# EAGLE board Esquema20 -2 (EAGLE 9.3.0)
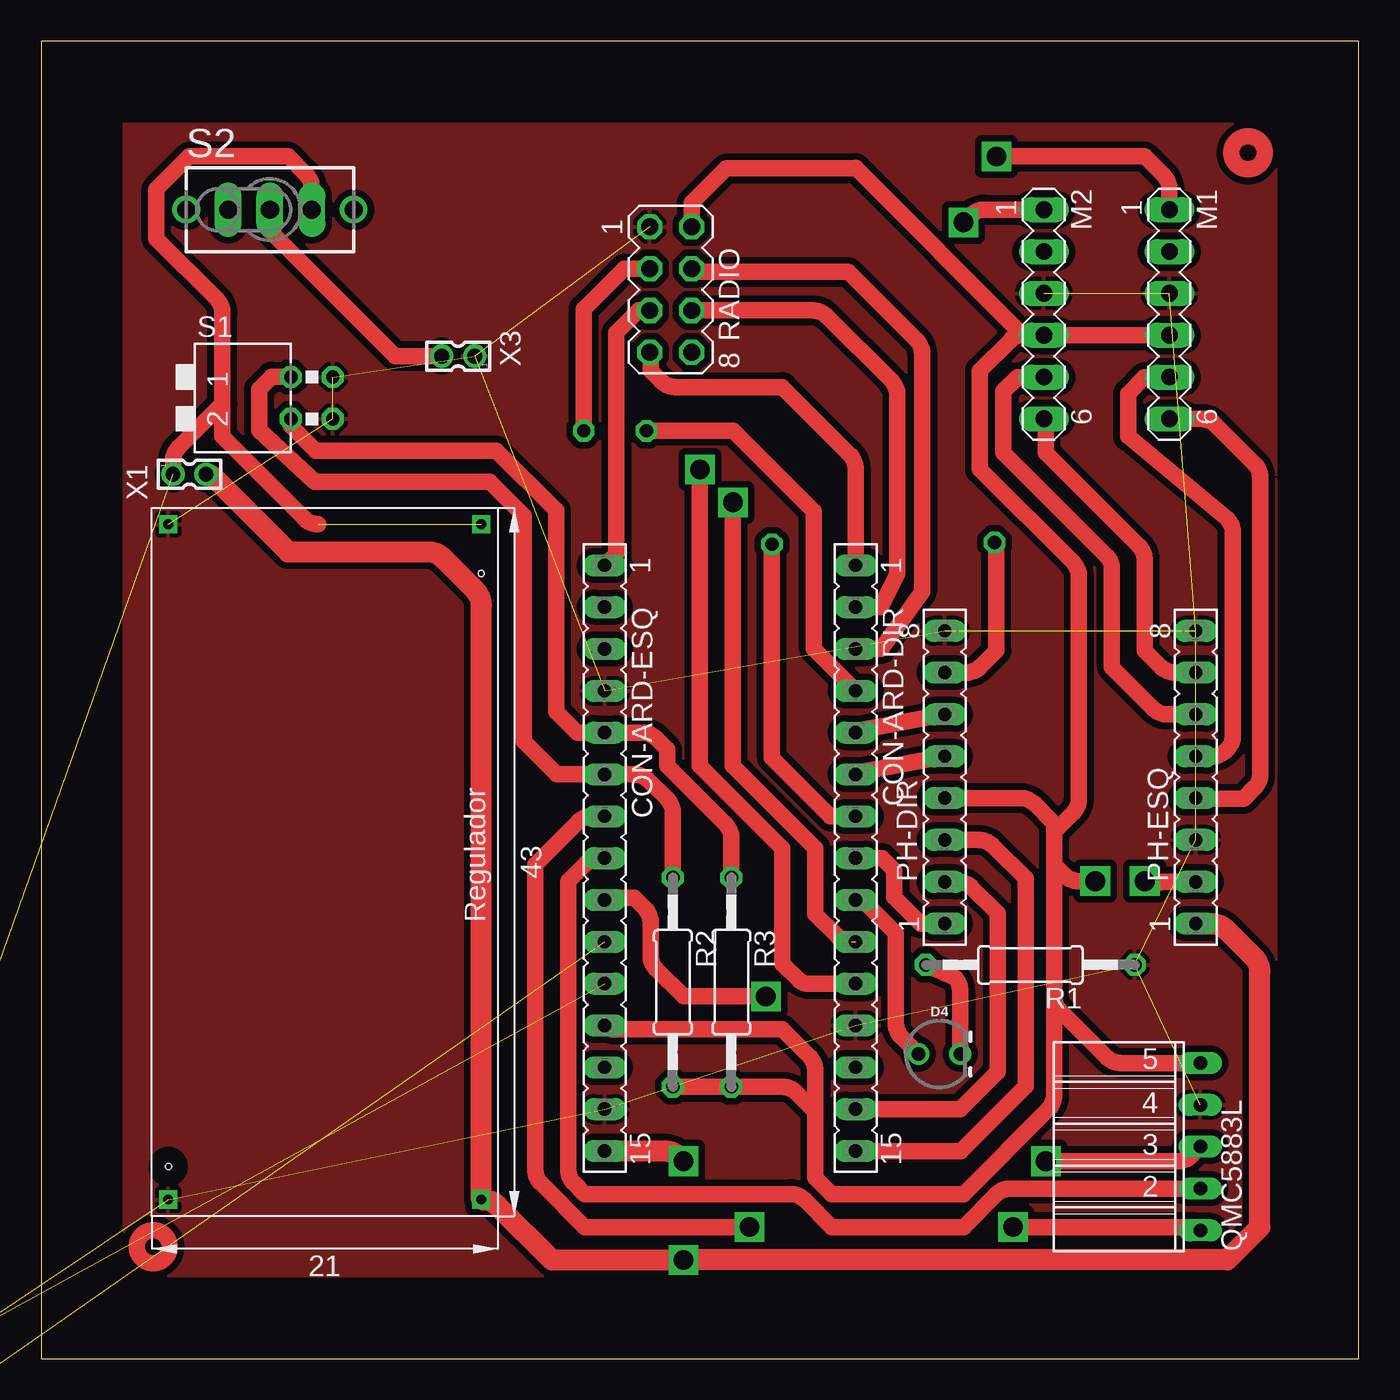
[diagram p0: board, top side]
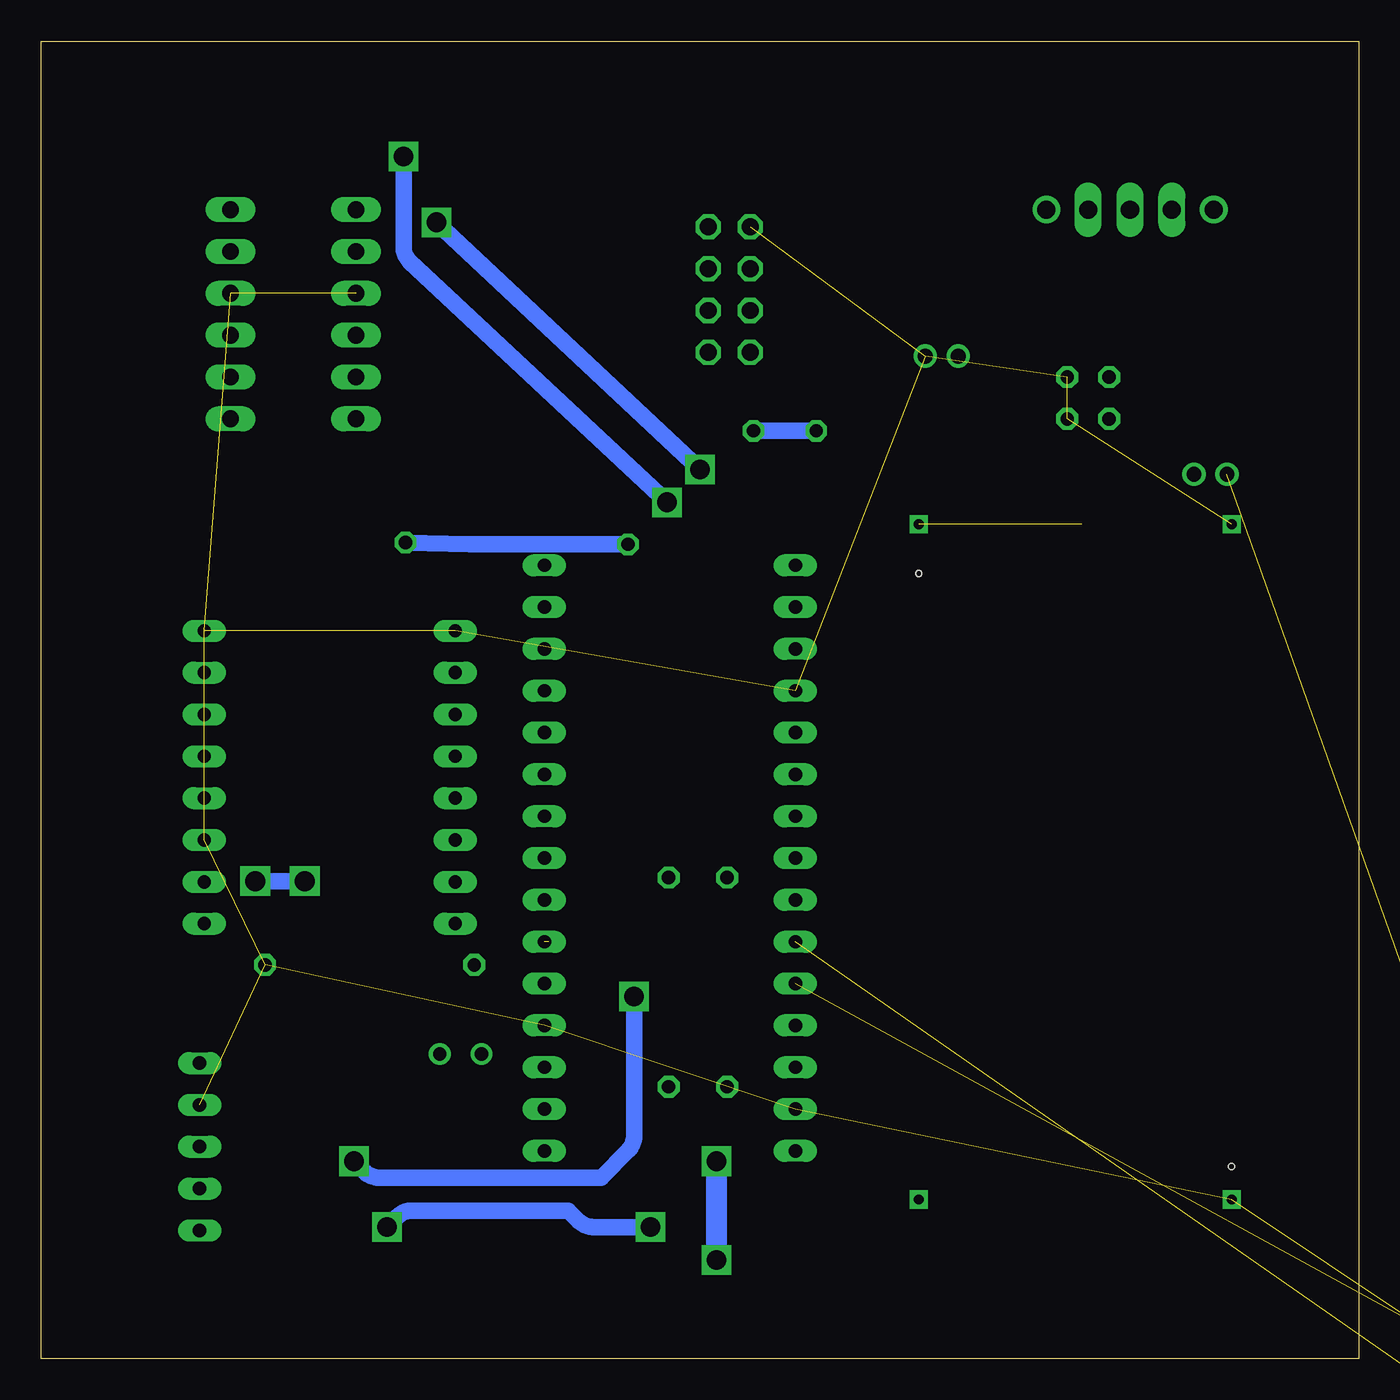
[diagram p1: board, bottom side, seen from below]

Size 80 x 80 mm. Coordinates in mm from the lower left corner, seen from the top.
Outline: 0,0 80,0 80,80 0,80 0,0
Copper layers (1*16): Top 0.035mm / dielectric 1.5mm / Bottom 0.035mm
Design rules "default *": minimum track width 6mil, minimum drill 0.35mm, track to track 16mil, track to pad 16mil, pad to pad 16mil, via to via 6mil, smd to smd 6mil, copper to edge 40mil, drill to drill 6mil, minimum pad ring 10mil, minimum via ring 8mil, stop-mask expansion 4mil, vias tented up to drill 0mil, thermal gap 10mil
Net classes: 0 default: width 1 mm; 1 VCC: width 1 mm

## Footprints (pad centres in the part's own frame; a part is rotated, then mirrored left to right if it is on the bottom)
FE15 = drill 0.813 long: 1 -17.78,0; 2 -15.24,0; 3 -12.7,0; 4 -10.16,0; 5 -7.62,0; 6 -5.08,0; 7 -2.54,0; 8 0,0; 9 2.54,0; 10 5.08,0; 11 7.62,0; 12 10.16,0; 13 12.7,0; 14 15.24,0; 15 17.78,0
LED_3MM-NS = drill 0.813: A -1.27,0; K 1.27,0
MA06-1 = drill 1.016 long: 1 -6.35,0; 2 -3.81,0; 3 -1.27,0; 4 1.27,0; 5 3.81,0; 6 6.35,0
FE08 = drill 0.813 long: 1 -8.89,0; 2 -6.35,0; 3 -3.81,0; 4 -1.27,0; 5 1.27,0; 6 3.81,0; 7 6.35,0; 8 8.89,0
FE05W = drill 0.813 long: 1 -5.08,0; 2 -2.54,0; 3 0,0; 4 2.54,0; 5 5.08,0
0207/12 = drill 0.813 octagon: 1 -6.35,0; 2 6.35,0
MA04-2 = drill 1.016 octagon: 1 -3.81,-1.27; 2 -3.81,1.27; 3 -1.27,-1.27; 4 -1.27,1.27; 5 1.27,-1.27; 6 1.27,1.27; 7 3.81,-1.27; 8 3.81,1.27
DA-02 = drill 0.813 octagon: 1 -1.27,-1.27; 2 1.27,-1.27; 3 1.27,1.27; 4 -1.27,1.27
TL3XYO = drill 1.1 pad 1.422 long: 1 -2.54,0; 2 0,0; 3 2.54,0 | drill 1.1 pad 1.676: M1 -5.08,0; M2 5.08,0
REGULADOR-FP = drill 0.6 square: P$1 -19,3; P$2 -19,-16; P$3 22,-16; P$4 22,3 | hole 0.35: -16,3; 20,-16
332-02 = drill 0.9 pad 1.27: 1 0,-1; 2 0,1

## Placement (x,y rotation side)
CON-ARD-DIR  [FE15]  49.45,30.4 270 top
CON-ARD-ESQ  [FE15]  34.21,30.4 270 top
D1  [LED_3MM-NS]  -12,-6 0 top  (outside the outline)
D2  [LED_3MM-NS]  -17,-6 0 top  (outside the outline)
D4  [LED_3MM-NS]  54.53,18.51 0 top
M1  [MA06-1]  68.5,63.42 270 top
M2  [MA06-1]  60.88,63.42 270 top
PH-DIR  [FE08]  54.86,35.31 90 top
PH-ESQ  [FE08]  70.1,35.31 90 top
QMC5883L  [FE05W]  70.38,12.88 90 top
R1  [0207/12]  60.06,23.92 180 top
R2  [0207/12]  38.35,22.87 270 top
R3  [0207/12]  41.9,22.87 270 top
RADIO  [MA04-2]  38.22,64.92 270 top
S1  [DA-02]  16.43,58.34 270 top
S2  TL36YO  [TL3XYO]  13.89,69.77 0 top
U$1  REGULADOR  [REGULADOR-FP]  23.72,31.67 270 top
X1  332-02  [332-02]  9,53.71 270 top
X3  332-02  [332-02]  25.32,60.88 90 top

## Library data of the parts
CON-ARD-DIR PH-DIR PH-ESQ QMC5883L = con-lsta; OC_FARNELL: unknown; OC_NEWARK: unknown
CON-ARD-ESQ = con-lsta; OC_FARNELL: unknown; OC_NEWARK: unknown; SPICEPREFIX: X
D1 D2 D4 = SparkFun-LED
M1 M2 RADIO = con-lstb; OC_FARNELL: unknown; OC_NEWARK: unknown
R1-R3 = resistor
S1 = switch-dil; OC_FARNELL: 1255229; OC_NEWARK: unknown
S2 = switch
U$1 = robo-bdp
X1 X3 = con-garry

## Nets
3V3: CON-ARD-ESQ.2
5V: CON-ARD-ESQ.12 M1.4 M2.4 PH-DIR.4 PH-ESQ.2 QMC5883L.5 R2.2 R3.2 RADIO.2
A1: CON-ARD-ESQ.5 R3.1 S1.2
A2: CON-ARD-ESQ.6 R2.1 S1.1
A3: CON-ARD-ESQ.7 QMC5883L.1
A4: CON-ARD-ESQ.8 QMC5883L.2
A5: CON-ARD-ESQ.9 QMC5883L.3
A6: CON-ARD-ESQ.10 D1.K
A7: CON-ARD-ESQ.11 D2.A
D2: CON-ARD-DIR.11 M2.1
D3: CON-ARD-DIR.10 M1.1
D4: CON-ARD-DIR.9 D4.A
D5: CON-ARD-DIR.8 PH-DIR.1
D6: CON-ARD-DIR.7 PH-DIR.7
D7: CON-ARD-DIR.5 PH-DIR.6
D8: CON-ARD-DIR.6 PH-DIR.5
D9: CON-ARD-DIR.4 RADIO.3
D10: CON-ARD-DIR.3 RADIO.4
D11: CON-ARD-DIR.2 RADIO.6
D12: CON-ARD-DIR.1 RADIO.7
D13: CON-ARD-ESQ.1 RADIO.5
GND: CON-ARD-DIR.12 CON-ARD-ESQ.4 CON-ARD-ESQ.14 D2.K M1.3 M2.3 PH-DIR.8 PH-ESQ.3 PH-ESQ.8 QMC5883L.4 R1.1 RADIO.1 S1.3 S1.4 U$1.P$2 U$1.P$3 X3.1
IRQ: RADIO.8
M1_1: M1.6 PH-ESQ.4
M1_2: M1.5 PH-ESQ.5
M2_1: M2.6 PH-ESQ.7
M2_2: M2.5 PH-ESQ.6
N$1: S2.2 X3.2
N$5: D4.K R1.2
REF: CON-ARD-ESQ.3
RST: CON-ARD-DIR.13
RST_E: CON-ARD-ESQ.13
RX0: CON-ARD-DIR.14 PH-DIR.2
SV1_2: M1.2
SV2_2: M2.2
TX1: CON-ARD-DIR.15 PH-DIR.3
VCC [VCC]: D1.A S2.3 U$1.P$1 X1.1
VO: CON-ARD-ESQ.15 PH-ESQ.1 U$1.P$4 X1.2

## Tracks (layer width: path | path; a pad name or v marks a point on that pad's centre or on a via)
5V  (via drill 1.2 pad 1.2)
  Top 1: 59.61,62.15 49.45,72.31 49.42,72.28 41.6,72.28 39.49,70.18 RADIO.2 | 59.61,62.15 M2.4 M1.4 | 59.61,62.15 arc45 58.83,61.83 57,60 57,54 62.65,48.35 arc-45 63,47.5 63,34 arc-45 62.65,33.15 61.5,32 | CON-ARD-ESQ.12 arc45 34.79,20 45,20 46.65,18.35 arc-45 47,17.5 47,15 | 61.5,22 61.5,16 arc-45 61.15,15.15 56,10 48,10 47,11 47,15 | 61.5,22 61.5,30 | 61.5,30 61.5,32 | 61.5,32 61.5,32.5 60.31,33.69 arc45 59.46,34.04 PH-DIR.4 | 61.5,22 arc45 61.85,21.15 64.69,18.31 arc45 65.54,17.96 QMC5883L.5 | 47,15 45.84,16.16 arc45 44.99,16.52 R3.2 R2.2 | PH-ESQ.2 68.09,28.96 arc-45 v67,29 | v64,29 63,29 arc-45 62.15,29.35 61.5,30
  Bottom 1: v67,29 v64,29
A1
  Top 1: S1.2 15.16,56.64 16.66,55.14 27.63,55.14 31.26,51.51 31.26,39.29 32.53,38.02 CON-ARD-ESQ.5 36.48,38.02 arc-45 37.33,37.67 38,37 38,36 41.55,32.45 arc-45 41.91,31.6 R3.1
A2
  Top 1: S1.1 15.13,59.63 13.99,59.63 13.23,58.87 13.23,56.38 16.61,53.26 27.23,53.26 29.31,51.18 29.31,37.49 31.31,35.48 CON-ARD-ESQ.6 36.02,35.48 arc-45 36.87,35.13 38,34 arc-45 38.35,33.15 R2.1
A3  (via drill 1.2 pad 1)
  Top 1: QMC5883L.1 arc45 69.89,8 v59,8 | CON-ARD-ESQ.7 33.44,32.94 arc45 32.59,32.59 30,30 30,11.5 arc45 30.35,10.65 33,8 v43,8
  Bottom 1: v59,8 58.35,8.65 arc45 57.5,9 48,9 47.35,8.35 arc-45 46.5,8 v43,8
A4
  Top 1: QMC5883L.2 58.84,10.34 arc45 57.99,9.99 56,8 48,8 46.35,9.65 arc45 45.5,10 33,10 32.35,10.65 arc-45 32,11.5 32,29 33.05,30.05 arc-45 33.9,30.4 CON-ARD-ESQ.8
A5  (via drill 1.2 pad 1)
  Top 1: QMC5883L.3 69.85,12.35 arc-45 69,12 v61,12 | CON-ARD-ESQ.9 arc-45 34.55,28 36,28 36.65,27.35 arc-45 37,26.5 37,24.5 arc45 37.35,23.65 39,22 v44,22
  Bottom 1: v44,22 44,13.5 arc45 44.35,12.65 46,11 59.5,11 arc45 60.35,11.35 v61,12
A6  (1 unrouted)
A7  (1 unrouted)
D2  (via drill 1.2 pad 1)
  Top 1: v40,54 40,36 45,31 45,24 46,23 arc45 46.53,22.78 CON-ARD-DIR.11 | v56,69 56.42,69.42 arc-45 57.27,69.77 M2.1
  Bottom 1: v40,54 v56,69
D3  (via drill 1.2 pad 1)  (1 unrouted)
  Top 1: v42,52 42,36 47,31 47,27 48.33,25.67 arc45 49.18,25.32 | v58,73 67,73 68.15,71.85 arc-45 68.5,71 M1.1
  Bottom 1: v42,52 57.65,66.65 arc45 58,67.5 v58,73
D4
  Top 1: CON-ARD-DIR.9 49.86,27.86 51.89,25.83 51.89,20.38 arc45 52.24,19.53 D4.A
D5
  Top 1: CON-ARD-DIR.8 51.05,30.4 51.79,29.66 51.79,28.04 53.4,26.42 PH-DIR.1
D6  (via drill 0.8 pad 1.3)
  Top 1: CON-ARD-DIR.7 47.91,32.94 44.37,36.48 v44.37,49.45 | PH-DIR.7 56.16,41.66 arc45 57.01,42.01 58,43 58,49.27 arc45 v57.88,49.56
  Bottom 1: v44.37,49.45 53.99,49.45 v57.88,49.56
D7
  Top 1: PH-DIR.6 49.55,38.12 CON-ARD-DIR.5
D8
  Top 1: PH-DIR.5 49.55,35.58 CON-ARD-DIR.6
D9  (via drill 0.8 pad 1.3)
  Top 1: 36.98,66.13 36.98,66.16 RADIO.3 35.4,66.19 32.94,63.73 v32.94,56.34 | CON-ARD-DIR.4 46.91,43.1 46.91,51.45 42.02,56.34 v36.75,56.34
  Bottom 1: v36.75,56.34 v32.94,56.34
D10
  Top 1: CON-ARD-DIR.3 51.01,43.1 53.49,46.58 53.49,61.01 arc45 53.14,61.86 49,66 39.95,66 arc-45 RADIO.4
D11
  Top 1: CON-ARD-DIR.2 50.96,45.64 51.98,47.66 51.98,58.52 arc45 51.63,59.37 47.7,63.3 arc45 46.85,63.65 RADIO.6
D12
  Top 1: CON-ARD-DIR.1 49.45,54.05 arc45 49.1,54.9 45,59 38.5,59 arc-45 37.65,59.35 37,60 37,61 arc45 RADIO.7
D13
  Top 1: RADIO.5 36.27,63.65 34.92,62.3 34.92,48.89 CON-ARD-ESQ.1
GND  (16 unrouted)
  pour Top: 5,5 5,75 75,75 75,5
M1_1
  Top 1: PH-ESQ.4 arc45 70.2,34 73,34 73.66,34.66 arc45 74.01,35.51 74.01,53.49 arc45 73.66,54.34 71.28,56.72 arc45 70.43,57.07 M1.6
M1_2
  Top 1: M1.5 66.99,59.6 65.99,58.61 arc-45 66,58.59 66,56 72,51 arc-45 72.35,50.15 72.35,37.85 arc-45 72,37 71.93,36.93 arc-45 71.08,36.58 PH-ESQ.5
M2_1
  Top 1: PH-ESQ.7 68.84,41.66 arc-45 67.99,42.01 67,43 67,48.5 arc45 66.65,49.35 61,55 61,56.78 arc45 M2.6
M2_2
  Top 1: M2.5 59.3,59.61 58.42,58.73 58.42,55 64.7,48.72 arc-45 65,48 65,42 67.53,39.47 arc45 68.38,39.12 PH-ESQ.6
N$1
  Top 1: S2.2 13.89,68.5 21.51,60.88 X3.2
N$5
  Top 1: R1.2 55.45,23.18 arc-45 55.8,22.33 D4.K
RX0
  Top 1: CON-ARD-DIR.14 55.8,15.16 58.08,17.44 58.08,27.05 56.51,28.61 arc45 55.66,28.96 PH-DIR.2
TX1
  Top 1: CON-ARD-DIR.15 49.47,12.6 55.82,12.6 59.76,16.54 59.76,29.17 57.78,31.15 arc45 56.93,31.5 PH-DIR.3
VCC  (2 unrouted)
  Top 1: S2.3 16.43,71.07 arc45 16.08,71.92 15,73 9,73 7,71 7,68 10.65,64.35 arc-45 11,63.5 11,58 | 16.83,50.67 arc-45 15.98,51.02 11,56 11,58 | X1.1 8,54.51 arc-45 8.36,55.35 11,58
VO  (via drill 1.2 pad 1.27)
  Top 1.27: PH-ESQ.1 71.05,26.42 arc-45 71.95,26.05 73.63,24.37 arc-45 74,23.47 74,8 72,6 v39,6 31,6 27.7,9.3 arc45 26.8,9.67 U$1.P$4 26.72,45.75 arc45 26.35,46.65 24.37,48.63 arc45 23.47,49 15,49 10.51,53.49 arc45 X1.2 arc-45 X1.2 | CON-ARD-ESQ.15 37.85,12.62 arc-45 38.75,12.25 v39,12
  Bottom 1.27: v39,12 v39,6
(copper drawn outside any net)
  shapes: Top circle x2